# EAGLE board opengarden_remote_v1 (EAGLE 6.1)
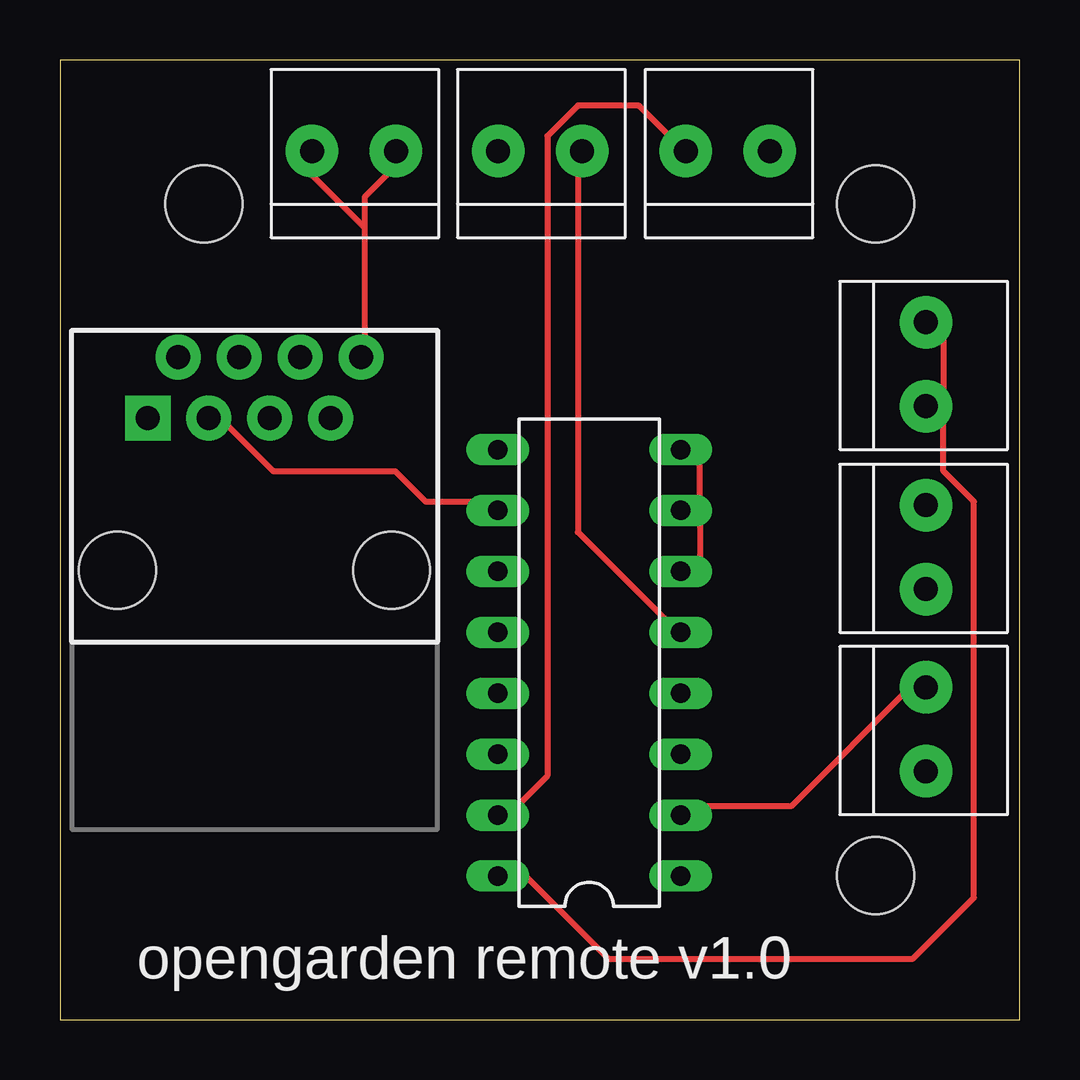
[diagram p0: board, top side]
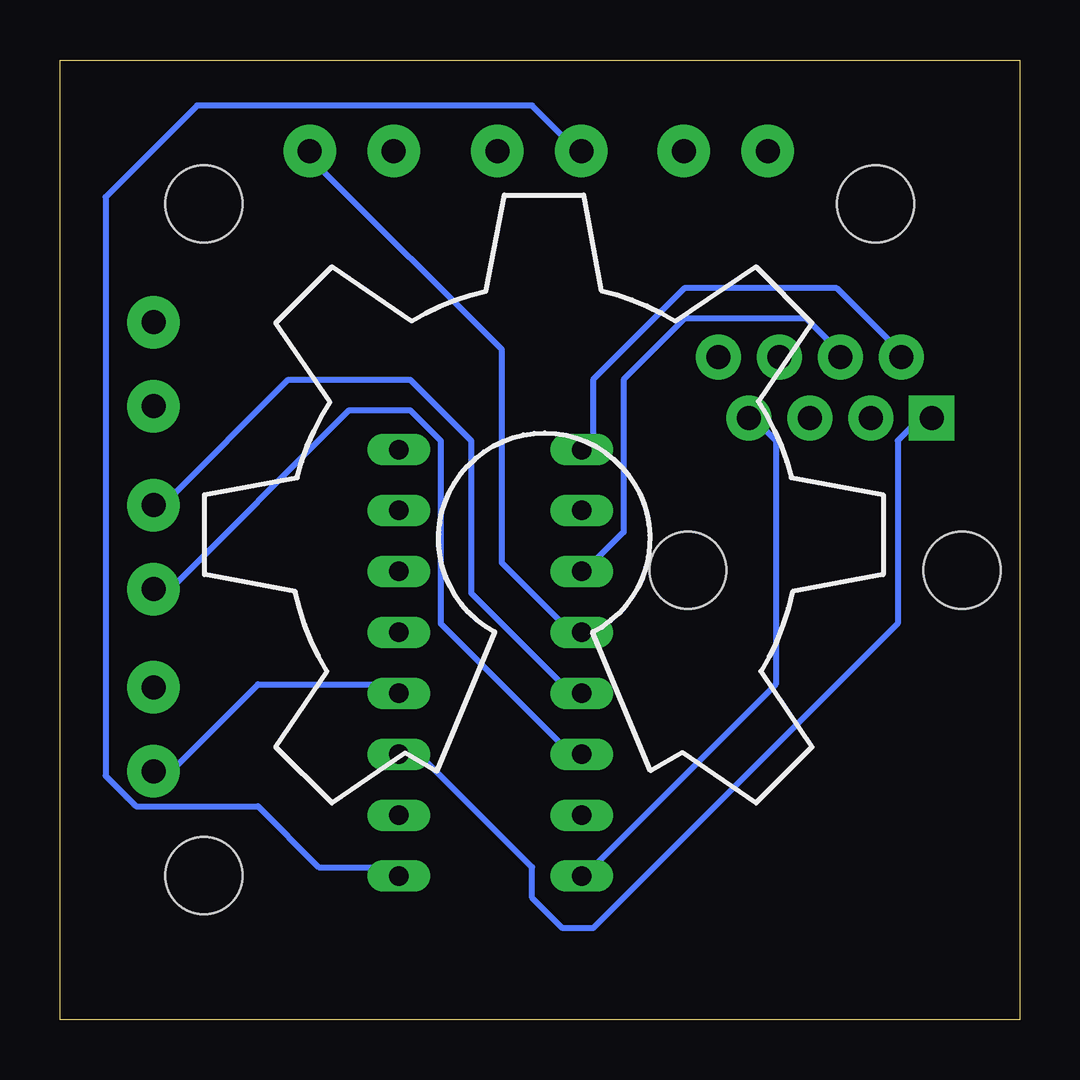
[diagram p1: board, bottom side, seen from below]

Size 40 x 40 mm. Coordinates in mm from the lower left corner, seen from the top.
Outline: 0,0 40,0 40,40 0,40 0,0
Copper layers (1*16): Top 0.035mm / dielectric 1.5mm / Bottom 0.035mm
Design rules: minimum track width 10mil, minimum drill 24mil, track to track 8mil, track to pad 8mil, pad to pad 8mil, via to via 8mil, smd to smd 8mil, copper to edge 40mil, drill to drill 8mil, minimum pad ring 10mil, minimum via ring 8mil, stop-mask expansion 4mil, vias tented up to drill 0mil, thermal gap 10mil
Holes 3.2 mm at 6,34 34,34 34,6

## Footprints (pad centres in the part's own frame; a part is rotated, then mirrored left to right if it is on the bottom)
DIL16 = drill 0.813 long: 1 -8.89,-3.81; 2 -6.35,-3.81; 3 -3.81,-3.81; 4 -1.27,-3.81; 5 1.27,-3.81; 6 3.81,-3.81; 7 6.35,-3.81; 8 8.89,-3.81; 9 8.89,3.81; 10 6.35,3.81; 11 3.81,3.81; 12 1.27,3.81; 13 -1.27,3.81; 14 -3.81,3.81; 15 -6.35,3.81; 16 -8.89,3.81
1X2-3.5MM = drill 1 pad 2.184: 1 1.8,0; 2 -1.7,0
RJ45-8 = drill 1 pad 1.88 square: 1 -4.445,6.35 | drill 1 pad 1.88: 2 -3.175,8.89; 3 -1.905,6.35; 4 -0.635,8.89; 5 0.635,6.35; 6 1.905,8.89; 7 3.175,6.35; 8 4.445,8.89 | hole 3.2: -5.715,0; 5.715,0

## Placement (x,y rotation side)
IC1  4051N  [DIL16]  22.06,14.87 90 top
J1  1X2-3.5MM  [1X2-3.5MM]  36.1,19.74 270 top
J2  1X2-3.5MM  [1X2-3.5MM]  27.79,36.2 0 top
J3  1X2-3.5MM  [1X2-3.5MM]  19.97,36.2 0 top
J4  1X2-3.5MM  [1X2-3.5MM]  12.2,36.2 0 top
J9  1X2-3.5MM  [1X2-3.5MM]  36.1,12.15 270 top
J10  1X2-3.5MM  [1X2-3.5MM]  36.1,27.37 270 top
U$1  RJ45-8PTH  [RJ45-8]  8.11,18.73 0 top
U$2  [OSHW_8X1000_NOTEXT]  34,9 0 bottom

## Library data of the parts
IC1 = 40xx
J1-J4 J9 J10 = adafruit
U$1 = SparkFun-Connectors
U$2 = ohw-logo

## Nets
GND: J4.1 J4.2 U$1.8
N$1: IC1.13 J1.2
N$2: IC1.14 J1.1
N$3: IC1.15 J2.2
N$4: IC1.12 J2.1
N$5: IC1.1 J3.2
N$7: IC1.5 J3.1
N$8: IC1.2 J9.2
N$9: IC1.4 J9.1
N$43: IC1.3 U$1.1
N$44: IC1.9 U$1.2
N$45: IC1.10 U$1.3
N$46: IC1.11 U$1.4
N$47: IC1.6 IC1.7 IC1.8
VCC: IC1.16 J10.1 J10.2 U$1.7

## Tracks (layer width: path | path; a pad name or v marks a point on that pad's centre or on a via)
GND
  Top 0.254: 12.7,33.02 12.7,34.29 13.97,35.56 J4.1 | 12.7,33.02 12.7,27.94 U$1.8 | 12.7,33.02 10.16,35.56 J4.2
N$1
  Bottom 0.254: IC1.13 19.05,13.97 22.86,17.78 22.86,24.13 25.4,26.67 30.48,26.67 35.56,21.59 J1.2
N$2
  Bottom 0.254: IC1.14 19.05,11.43 24.13,16.51 24.13,24.13 25.4,25.4 27.94,25.4 35.56,17.78 J1.1
N$3
  Top 0.254: IC1.15 19.05,8.89 20.32,10.16 20.32,36.83 21.59,38.1 24.13,38.1 25.4,36.83 J2.2
N$4
  Bottom 0.254: IC1.12 19.05,16.51 21.59,19.05 21.59,27.94 29.21,35.56 J2.1
N$5
  Bottom 0.254: IC1.1 26.67,6.35 29.21,6.35 31.75,8.89 36.83,8.89 38.1,10.16 38.1,34.29 34.29,38.1 20.32,38.1 19.05,36.83 J3.2
N$7
  Top 0.254: IC1.5 25.4,16.51 21.59,20.32 21.59,35.56 J3.1
N$8
  Top 0.254: IC1.2 26.67,8.89 30.48,8.89 35.56,13.97 J9.2
N$9
  Bottom 0.254: IC1.4 26.67,13.97 31.75,13.97 35.56,10.16 J9.1
N$43
  Bottom 0.254: IC1.3 25.4,11.43 20.32,6.35 20.32,5.08 19.05,3.81 17.78,3.81 5.08,16.51 5.08,24.13 3.81,25.4 U$1.1
N$44
  Bottom 0.254: IC1.9 17.78,24.13 17.78,26.67 13.97,30.48 7.62,30.48 5.08,27.94 U$1.2
N$45
  Top 0.254: IC1.10 17.78,21.59 15.24,21.59 13.97,22.86 8.89,22.86 6.35,25.4 U$1.3
N$46
  Bottom 0.254: IC1.11 17.78,19.05 16.51,20.32 16.51,26.67 13.97,29.21 8.89,29.21 7.62,27.94 U$1.4
N$47
  Top 0.254: 26.67,21.59 26.67,19.05 IC1.6 | 26.67,21.59 26.67,24.13 IC1.8 | 26.67,21.59 IC1.7
VCC
  Top 0.254: 36.83,25.4 36.83,29.21 J10.2 | 36.83,25.4 36.83,22.86 38.1,21.59 38.1,5.08 35.56,2.54 22.86,2.54 19.05,6.35 IC1.16 | 36.83,25.4 J10.1
  Bottom 0.254: IC1.16 17.78,6.35 10.16,13.97 10.16,24.13 11.43,25.4 U$1.7

## Text on the board
tNames: opengarden remote v1.0
tDocu: 5/6 | 3/4 | - | + | 1/2 | 7/8